# EAGLE board print (EAGLE 6.1)
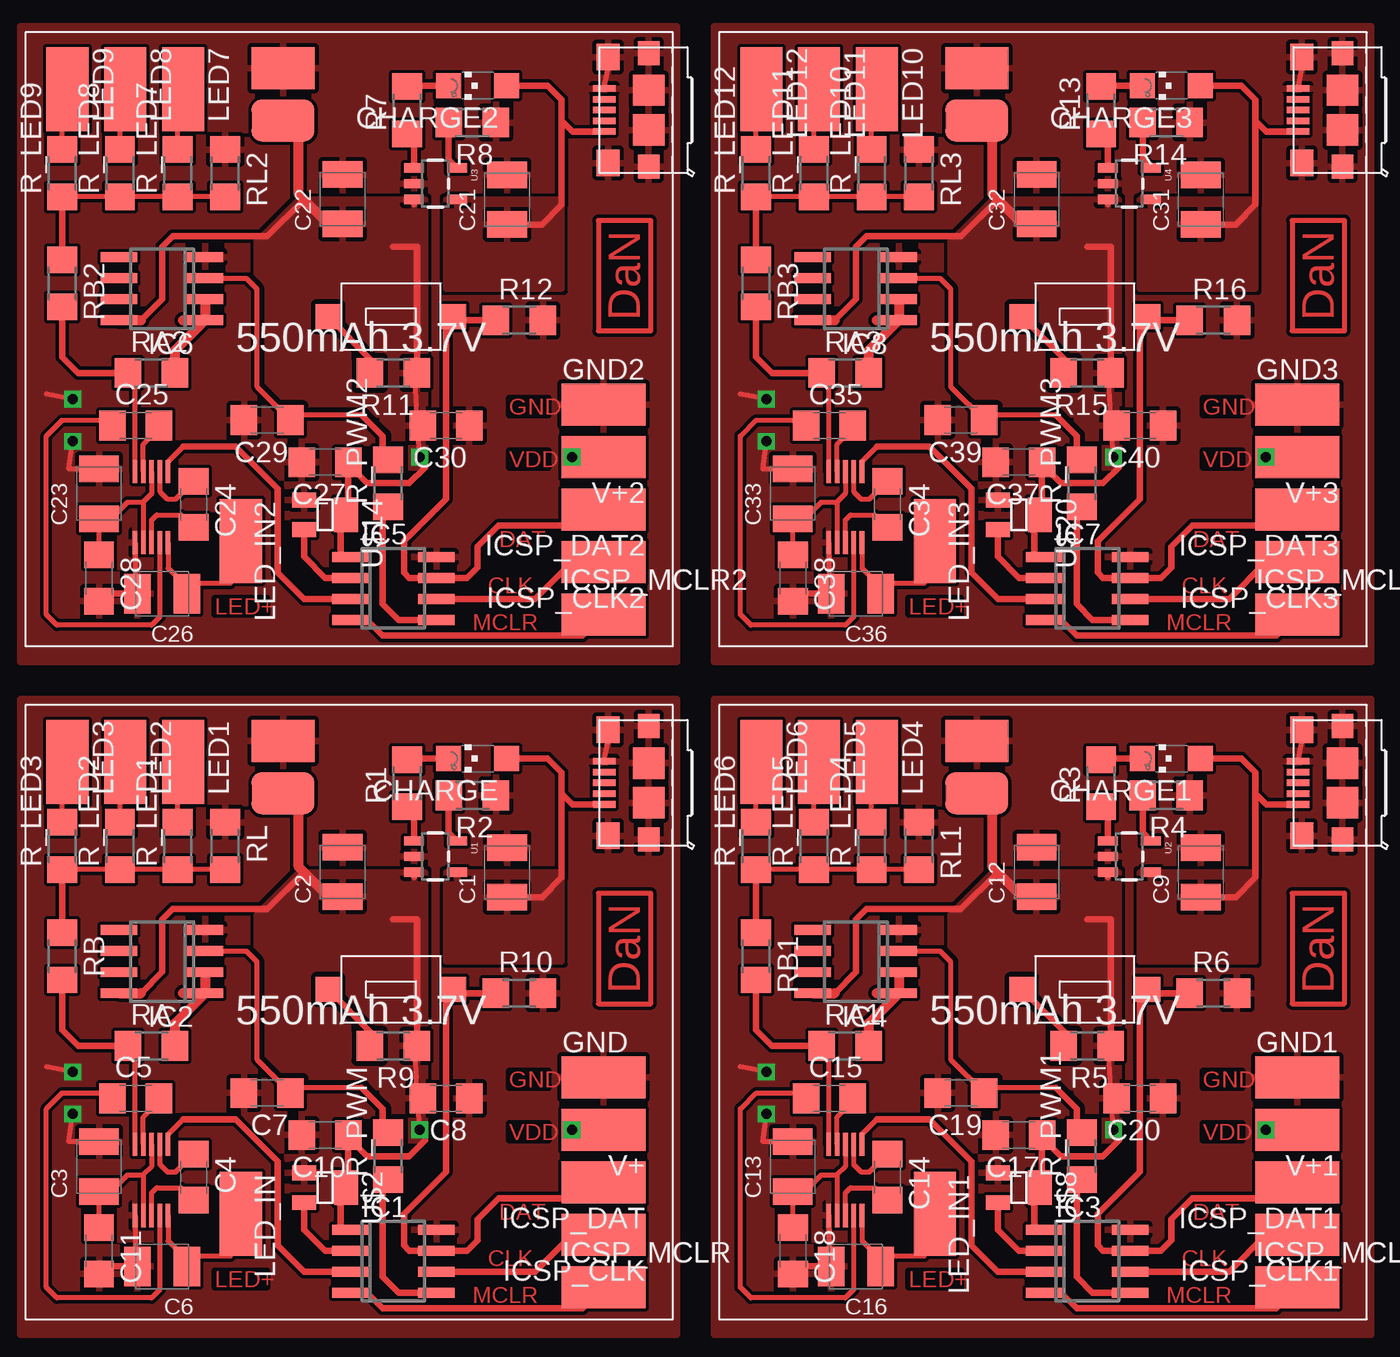
[diagram p0: board, top side]
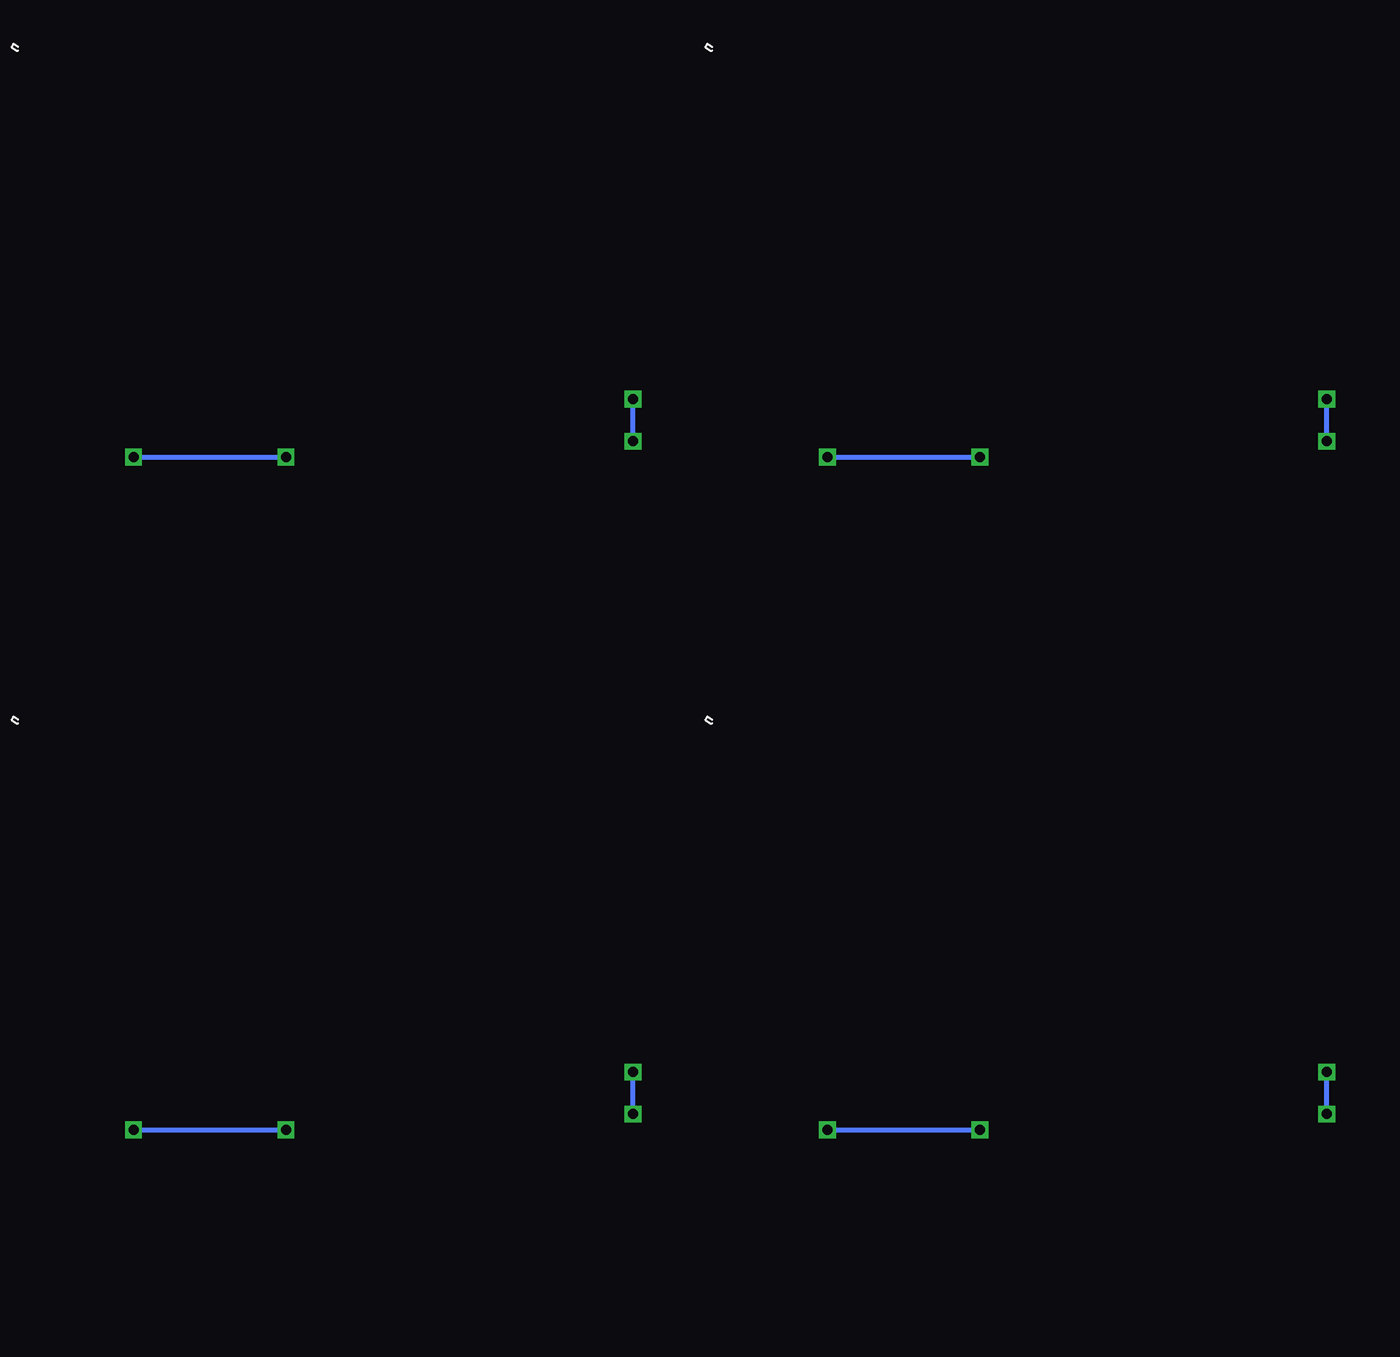
[diagram p1: board, bottom side, seen from below]

No outline drawn. Coordinates in mm, seen from the top.
Copper layers (1*16): Top 0.035mm / dielectric 1.5mm / Bottom 0.035mm
Design rules: minimum track width 10mil, minimum drill 24mil, track to track 8mil, track to pad 8mil, pad to pad 8mil, via to via 8mil, smd to smd 8mil, copper to edge 40mil, drill to drill 8mil, minimum pad ring 10mil, minimum via ring 8mil, stop-mask expansion 4mil, vias tented up to drill 0mil, thermal gap 10mil

## Footprints (pad centres in the part's own frame; a part is rotated, then mirrored left to right if it is on the bottom)
SMC_B = smd 1.6 x 2.4: + -1.5,0; - 1.5,0
C1206 = smd 1.6 x 1.8: 1 -1.4,0; 2 1.4,0
CHIPLED_1206 = smd 1.5 x 1.5: A 0,-1.75; C 0,1.75
SMD2,54-5,08 = smd 2.54 x 5.08: 1 0,0
SO-08 = smd 0.6 x 2.2: 1 -1.905,-2.6; 2 -0.635,-2.6; 3 0.635,-2.6; 4 1.905,-2.6; 5 1.905,2.6; 6 0.635,2.6; 7 -0.635,2.6; 8 -1.905,2.6
SO08 = smd 0.6 x 2.2: 1 -1.905,-2.6; 2 -0.635,-2.6; 3 0.635,-2.6; 4 1.905,-2.6; 5 1.905,2.6; 6 0.635,2.6; 7 -0.635,2.6; 8 -1.905,2.6
R1206 = smd 1.6 x 1.803: 1 -1.422,0; 2 1.422,0
SOT23-5 = smd 0.55 x 1.2: 1 -0.95,-1.3; 2 0,-1.3; 3 0.95,-1.3; 4 0.95,1.3; 5 -0.95,1.3
UMAX/USOP_10L = smd 1.4 x 0.28: 1 -2,1; 2 -2,0.5; 3 -2,0; 4 -2,-0.5; 5 -2,-1; 6 2.3,-1; 7 2.3,-0.5; 8 2.3,0; 9 2.3,0.5; 10 2.3,1
SC70-3-W = smd 0.9 x 1.45: 1 -0.9,-1.275; 2 0.9,-1.275 | smd 2.1 x 1.45: 3 0,1.275
BAT520_CONN_SMD = smd 2.54 x 3.81: GND 1.905,0; VCC -1.27,0
MICRO_USB_B = smd 0.4 x 1.35: 1 -1.3,1.865; 2 -0.65,1.865; 3 0,1.865; 4 0.65,1.865; 5 1.3,1.865 | smd 1.6 x 1.4: GND1 -3.2,1.64; GND2 3.2,1.64 | smd 1.45 x 1.3: GND3 -3.425,-0.81; GND4 3.425,-0.81 | smd 1.9 x 1.9: GND5 -1.2,-0.81; GND6 1.2,-0.81
MICROBUTTON_2 = smd 1.5 x 1.5: P$1 3.625,0.095; P$2 -3.975,0.095

## Placement (x,y rotation side)
C1  >4.7u  [SMC_B]  29.73,27.61 90 top
C2  >4.7u  [SMC_B]  19.8,27.63 90 top
C3  2.2u-10u  [SMC_B]  5.08,9.84 90 top
C4  470n  [C1206]  10.79,9.21 270 top
C5  470n  [C1206]  7.3,13.97 0 top
C6  4u7  [SMC_B]  8.89,3.81 180 top
C7  470n  [C1206]  15.24,14.29 180 top
C8  100n  [C1206]  26.04,13.97 180 top
C9  >4.7u  [SMC_B]  71.64,27.61 90 top
C10  100n  [C1206]  18.73,11.75 180 top
C11  100n  [C1206]  5.08,4.76 270 top
C12  >4.7u  [SMC_B]  61.71,27.63 90 top
C13  2.2u-10u  [SMC_B]  46.99,9.84 90 top
C14  470n  [C1206]  52.7,9.21 270 top
C15  470n  [C1206]  49.21,13.97 0 top
C16  4u7  [SMC_B]  50.8,3.81 180 top
C17  100n  [C1206]  60.64,11.75 180 top
C18  100n  [C1206]  46.99,4.76 270 top
C19  470n  [C1206]  57.15,14.29 180 top
C20  100n  [C1206]  67.94,13.97 180 top
C21  >4.7u  [SMC_B]  29.73,68.25 90 top
C22  >4.7u  [SMC_B]  19.8,68.27 90 top
C23  2.2u-10u  [SMC_B]  5.08,50.48 90 top
C24  470n  [C1206]  10.79,49.85 270 top
C25  470n  [C1206]  7.3,54.61 0 top
C26  4u7  [SMC_B]  8.89,44.45 180 top
C27  100n  [C1206]  18.73,52.39 180 top
C28  100n  [C1206]  5.08,45.4 270 top
C29  470n  [C1206]  15.24,54.93 180 top
C30  100n  [C1206]  26.04,54.61 180 top
C31  >4.7u  [SMC_B]  71.64,68.25 90 top
C32  >4.7u  [SMC_B]  61.71,68.27 90 top
C33  2.2u-10u  [SMC_B]  46.99,50.48 90 top
C34  470n  [C1206]  52.7,49.85 270 top
C35  470n  [C1206]  49.21,54.61 0 top
C36  4u7  [SMC_B]  50.8,44.45 180 top
C37  100n  [C1206]  60.64,52.39 180 top
C38  100n  [C1206]  46.99,45.4 270 top
C39  470n  [C1206]  57.15,54.93 180 top
C40  100n  [C1206]  67.94,54.61 180 top
CHARGE  [CHIPLED_1206]  27.95,34.49 90 top
CHARGE1  [CHIPLED_1206]  69.86,34.49 90 top
CHARGE2  [CHIPLED_1206]  27.95,75.13 90 top
CHARGE3  [CHIPLED_1206]  69.86,75.13 90 top
GND  [SMD2,54-5,08]  35.56,15.24 270 top
GND1  [SMD2,54-5,08]  77.47,15.24 270 top
GND2  [SMD2,54-5,08]  35.56,55.88 270 top
GND3  [SMD2,54-5,08]  77.47,55.88 270 top
IC1  PIC12F683SN  [SO-08]  22.86,4.13 270 top
IC2  LM358D  [SO08]  8.89,22.23 90 top
IC3  PIC12F683SN  [SO-08]  64.77,4.13 270 top
IC4  LM358D  [SO08]  50.8,22.23 90 top
IC5  PIC12F683SN  [SO-08]  22.86,44.77 270 top
IC6  LM358D  [SO08]  8.89,62.87 90 top
IC7  PIC12F683SN  [SO-08]  64.77,44.77 270 top
IC8  LM358D  [SO08]  50.8,62.87 90 top
ICSP_CLK  [SMD2,54-5,08]  35.56,5.71 90 top
ICSP_CLK1  [SMD2,54-5,08]  77.47,5.71 90 top
ICSP_CLK2  [SMD2,54-5,08]  35.56,46.35 90 top
ICSP_CLK3  [SMD2,54-5,08]  77.47,46.35 90 top
ICSP_DAT  [SMD2,54-5,08]  35.56,8.89 90 top
ICSP_DAT1  [SMD2,54-5,08]  77.47,8.89 90 top
ICSP_DAT2  [SMD2,54-5,08]  35.56,49.53 90 top
ICSP_DAT3  [SMD2,54-5,08]  77.47,49.53 90 top
ICSP_MCLR  [SMD2,54-5,08]  35.56,2.54 270 top
ICSP_MCLR1  [SMD2,54-5,08]  77.47,2.54 270 top
ICSP_MCLR2  [SMD2,54-5,08]  35.56,43.18 270 top
ICSP_MCLR3  [SMD2,54-5,08]  77.47,43.18 270 top
LED1  [SMD2,54-5,08]  10.16,34.29 180 top
LED2  [SMD2,54-5,08]  6.67,34.29 180 top
LED3  [SMD2,54-5,08]  3.17,34.29 180 top
LED4  [SMD2,54-5,08]  52.07,34.29 180 top
LED5  [SMD2,54-5,08]  48.58,34.29 180 top
LED6  [SMD2,54-5,08]  45.09,34.29 180 top
LED7  [SMD2,54-5,08]  10.16,74.93 180 top
LED8  [SMD2,54-5,08]  6.67,74.93 180 top
LED9  [SMD2,54-5,08]  3.17,74.93 180 top
LED10  [SMD2,54-5,08]  52.07,74.93 180 top
LED11  [SMD2,54-5,08]  48.58,74.93 180 top
LED12  [SMD2,54-5,08]  45.09,74.93 180 top
LED_IN  [SMD2,54-5,08]  13.65,6.99 180 top
LED_IN1  [SMD2,54-5,08]  55.56,6.99 180 top
LED_IN2  [SMD2,54-5,08]  13.65,47.62 180 top
LED_IN3  [SMD2,54-5,08]  55.56,47.62 180 top
R1  330  [R1206]  23.7,33.01 90 top
R2  >3k8  [R1206]  27.63,32.27 180 top
R3  330  [R1206]  65.61,33.01 90 top
R4  >3k8  [R1206]  69.54,32.27 180 top
R5  1K  [R1206]  64.77,17.14 180 top
R6  10K  [R1206]  72.39,20.32 0 top
R7  330  [R1206]  23.7,73.65 90 top
R8  >3k8  [R1206]  27.63,72.91 180 top
R9  1K  [R1206]  22.86,17.14 180 top
R10  10K  [R1206]  30.48,20.32 0 top
R11  1K  [R1206]  22.86,57.78 180 top
R12  10K  [R1206]  30.48,60.96 0 top
R13  330  [R1206]  65.61,73.65 90 top
R14  >3k8  [R1206]  69.54,72.91 180 top
R15  1K  [R1206]  64.77,57.78 180 top
R16  10K  [R1206]  72.39,60.96 0 top
R_LED1  [R1206]  9.84,29.21 90 top
R_LED2  [R1206]  6.35,29.21 90 top
R_LED3  [R1206]  2.86,29.21 90 top
R_LED4  [R1206]  51.75,29.21 90 top
R_LED5  [R1206]  48.26,29.21 90 top
R_LED6  [R1206]  44.77,29.21 90 top
R_LED7  [R1206]  9.84,69.85 90 top
R_LED8  [R1206]  6.35,69.85 90 top
R_LED9  [R1206]  2.86,69.85 90 top
R_LED10  [R1206]  51.75,69.85 90 top
R_LED11  [R1206]  48.26,69.85 90 top
R_LED12  [R1206]  44.77,69.85 90 top
R_PWM  [R1206]  22.54,10.48 90 top
R_PWM1  [R1206]  64.45,10.48 90 top
R_PWM2  [R1206]  22.54,51.12 90 top
R_PWM3  [R1206]  64.45,51.12 90 top
RA  [R1206]  8.26,17.14 0 top
RA1  [R1206]  50.16,17.14 0 top
RA2  [R1206]  8.26,57.78 0 top
RA3  [R1206]  50.16,57.78 0 top
RB  [R1206]  2.86,22.54 270 top
RB1  [R1206]  44.77,22.54 270 top
RB2  [R1206]  2.86,63.18 270 top
RB3  [R1206]  44.77,63.18 270 top
RL  [R1206]  12.7,29.21 270 top
RL1  [R1206]  54.61,29.21 270 top
RL2  [R1206]  12.7,69.85 270 top
RL3  [R1206]  54.61,69.85 270 top
U1  MCP73832  [SOT23-5]  25.4,28.57 270 top
U2  MCP73832  [SOT23-5]  67.31,28.57 270 top
U3  MCP73832  [SOT23-5]  25.4,69.22 270 top
U4  MCP73832  [SOT23-5]  67.31,69.22 270 top
U$1  MAX1910/12  [UMAX/USOP_10L]  8.26,8.89 90 top
U$2  MAX6375  [SC70-3-W]  18.73,8.57 270 top
U$3  BAT520_CONNECTION  [BAT520_CONN_SMD]  16.19,33.66 90 top
U$4  BAT_DS0201_PACKAGE  [BAT_DS0201]  19.68,19.68 0 top
U$5  MICRO_USB_B  [MICRO_USB_B]  37.47,33.02 90 top
U$6  MICROBUTTONE-MERCHAN  [MICROBUTTON_2]  22.54,20.64 180 top
U$7  MAX1910/12  [UMAX/USOP_10L]  50.16,8.89 90 top
U$8  MAX6375  [SC70-3-W]  60.64,8.57 270 top
U$9  BAT520_CONNECTION  [BAT520_CONN_SMD]  58.1,33.66 90 top
U$10  BAT_DS0201_PACKAGE  [BAT_DS0201]  61.59,19.68 0 top
U$11  MICRO_USB_B  [MICRO_USB_B]  79.38,33.02 90 top
U$12  MICROBUTTONE-MERCHAN  [MICROBUTTON_2]  64.45,20.64 180 top
U$13  MAX1910/12  [UMAX/USOP_10L]  8.26,49.53 90 top
U$14  MAX6375  [SC70-3-W]  18.73,49.21 270 top
U$15  BAT520_CONNECTION  [BAT520_CONN_SMD]  16.19,74.3 90 top
U$16  BAT_DS0201_PACKAGE  [BAT_DS0201]  19.68,60.33 0 top
U$17  MICRO_USB_B  [MICRO_USB_B]  37.47,73.66 90 top
U$18  MICROBUTTONE-MERCHAN  [MICROBUTTON_2]  22.54,61.28 180 top
U$19  MAX1910/12  [UMAX/USOP_10L]  50.16,49.53 90 top
U$20  MAX6375  [SC70-3-W]  60.64,49.21 270 top
U$21  BAT520_CONNECTION  [BAT520_CONN_SMD]  58.1,74.3 90 top
U$22  BAT_DS0201_PACKAGE  [BAT_DS0201]  61.59,60.33 0 top
U$23  MICRO_USB_B  [MICRO_USB_B]  79.38,73.66 90 top
U$24  MICROBUTTONE-MERCHAN  [MICROBUTTON_2]  64.45,61.28 180 top
V+  [SMD2,54-5,08]  35.56,12.06 90 top
V+1  [SMD2,54-5,08]  77.47,12.06 90 top
V+2  [SMD2,54-5,08]  35.56,52.7 90 top
V+3  [SMD2,54-5,08]  77.47,52.7 90 top

## Library data of the parts
C1-C40 R1-R16 R_LED1-R_LED12 R_PWM R_PWM1-R_PWM3 RA RA1-RA3 RB RB1-RB3 RL RL1-RL3 = rcl
CHARGE CHARGE1-CHARGE3 = led
GND GND1-GND3 ICSP_CLK ICSP_CLK1-ICSP_CLK3 ICSP_DAT ICSP_DAT1-ICSP_DAT3 ICSP_MCLR ICSP_MCLR1-ICSP_MCLR3 LED1-LED12 LED_IN LED_IN1-LED_IN3 V+ V+1-V+3 = wirepad
IC1 IC3 IC5 IC7 = microchip; MF: MICROCHIP; MPN: PIC12F683-I/SN; OC_FARNELL: 9759042; OC_NEWARK: 61K3434
IC2 IC4 IC6 IC8 = linear
U1-U4 U$1-U$24 = dan

## Nets
+5V: C1.+ CHARGE.A U1.4 U$5.1
+5V1: C9.+ CHARGE1.A U2.4 U$11.1
+5V2: C21.+ CHARGE2.A U3.4 U$17.1
+5V3: C31.+ CHARGE3.A U4.4 U$23.1
/OUT: IC1.2 U$2.2
/OUT1: IC3.2 U$8.2
/OUT2: IC5.2 U$14.2
/OUT3: IC7.2 U$20.2
/SHDN: IC1.3 U$1.6
/SHDN1: IC3.3 U$7.6
/SHDN2: IC5.3 U$13.6
/SHDN3: IC7.3 U$19.6
GND: C1.- C2.- C3.- C6.- C7.2 C8.1 C10.2 C11.2 GND.1 IC1.8 IC2.4 R2.1 R10.2 RL.1 U1.2 U$1.1 U$2.1 U$3.GND U$5.5 U$5.GND1 U$5.GND2 U$5.GND3 U$5.GND4 U$5.GND5 U$5.GND6
GND1: C9.- C12.- C13.- C16.- C17.2 C18.2 C19.2 C20.1 GND1.1 IC3.8 IC4.4 R4.1 R6.2 RL1.1 U2.2 U$7.1 U$8.1 U$9.GND U$11.5 U$11.GND1 U$11.GND2 U$11.GND3 U$11.GND4 U$11.GND5 U$11.GND6
GND2: C21.- C22.- C23.- C26.- C27.2 C28.2 C29.2 C30.1 GND2.1 IC5.8 IC6.4 R8.1 R12.2 RL2.1 U3.2 U$13.1 U$14.1 U$15.GND U$17.5 U$17.GND1 U$17.GND2 U$17.GND3 U$17.GND4 U$17.GND5 U$17.GND6
GND3: C31.- C32.- C33.- C36.- C37.2 C38.2 C39.2 C40.1 GND3.1 IC7.8 IC8.4 R14.1 R16.2 RL3.1 U4.2 U$19.1 U$20.1 U$21.GND U$23.5 U$23.GND1 U$23.GND2 U$23.GND3 U$23.GND4 U$23.GND5 U$23.GND6
LED_DAC: IC2.1 IC2.2 RA.2
LED_DAC1: IC4.1 IC4.2 RA1.2
LED_DAC2: IC6.1 IC6.2 RA2.2
LED_DAC3: IC8.1 IC8.2 RA3.2
N$1: R_LED1.1 R_LED2.1 R_LED3.1 RB.1 RL.2
N$2: C7.1 IC2.3 R_PWM.2
N$3: R2.2 U1.5
N$4: R1.1 U1.1
N$5: C4.2 U$1.3
N$6: C4.1 U$1.7
N$7: C5.2 U$1.9
N$8: C5.1 U$1.4
N$10: LED3.1 R_LED3.2
N$11: LED2.1 R_LED2.2
N$12: RA.1 RB.2 U$1.10
N$13: LED1.1 R_LED1.2
N$14: C6.+ LED_IN.1 U$1.5
N$15: CHARGE.C R1.2
N$16: R9.2 U$6.P$1
N$17: R4.2 U2.5
N$18: C14.2 U$7.3
N$19: C14.1 U$7.7
N$20: C15.2 U$7.9
N$21: C15.1 U$7.4
N$22: RA1.1 RB1.2 U$7.10
N$23: C16.+ LED_IN1.1 U$7.5
N$25: R_LED4.1 R_LED5.1 R_LED6.1 RB1.1 RL1.2
N$26: LED6.1 R_LED6.2
N$27: LED5.1 R_LED5.2
N$28: LED4.1 R_LED4.2
N$29: CHARGE1.C R3.2
N$30: R3.1 U2.1
N$31: C19.1 IC4.3 R_PWM1.2
N$32: R5.2 U$12.P$1
N$33: R8.2 U3.5
N$34: C24.2 U$13.3
N$35: C24.1 U$13.7
N$36: C25.2 U$13.9
N$37: C25.1 U$13.4
N$38: RA2.1 RB2.2 U$13.10
N$39: C26.+ LED_IN2.1 U$13.5
N$41: R_LED7.1 R_LED8.1 R_LED9.1 RB2.1 RL2.2
N$42: LED9.1 R_LED9.2
N$43: LED8.1 R_LED8.2
N$44: LED7.1 R_LED7.2
N$45: CHARGE2.C R7.2
N$46: R7.1 U3.1
N$47: C29.1 IC6.3 R_PWM2.2
N$48: R11.2 U$18.P$1
N$49: R14.2 U4.5
N$50: C34.2 U$19.3
N$51: C34.1 U$19.7
N$52: C35.2 U$19.9
N$53: C35.1 U$19.4
N$54: RA3.1 RB3.2 U$19.10
N$55: C36.+ LED_IN3.1 U$19.5
N$57: R_LED10.1 R_LED11.1 R_LED12.1 RB3.1 RL3.2
N$58: LED12.1 R_LED12.2
N$59: LED11.1 R_LED11.2
N$60: LED10.1 R_LED10.2
N$61: CHARGE3.C R13.2
N$62: R13.1 U4.1
N$63: C39.1 IC8.3 R_PWM3.2
N$64: R15.2 U$24.P$1
PIC_MCLR: IC1.4 ICSP_MCLR.1
PIC_MCLR1: IC3.4 ICSP_MCLR1.1
PIC_MCLR2: IC5.4 ICSP_MCLR2.1
PIC_MCLR3: IC7.4 ICSP_MCLR3.1
PIC_PGC: IC1.6 ICSP_CLK.1
PIC_PGC1: IC3.6 ICSP_CLK1.1
PIC_PGC2: IC5.6 ICSP_CLK2.1
PIC_PGC3: IC7.6 ICSP_CLK3.1
PIC_PGD: IC1.7 ICSP_DAT.1 R10.1 U$6.P$2
PIC_PGD1: IC3.7 ICSP_DAT1.1 R6.1 U$12.P$2
PIC_PGD2: IC5.7 ICSP_DAT2.1 R12.1 U$18.P$2
PIC_PGD3: IC7.7 ICSP_DAT3.1 R16.1 U$24.P$2
PIC_PWM: IC1.5 R_PWM.1
PIC_PWM1: IC3.5 R_PWM1.1
PIC_PWM2: IC5.5 R_PWM2.1
PIC_PWM3: IC7.5 R_PWM3.1
SWITCH: C3.+ C11.1 U$1.2 U$1.8
SWITCH1: C13.+ C18.1 U$7.2 U$7.8
SWITCH2: C23.+ C28.1 U$13.2 U$13.8
SWITCH3: C33.+ C38.1 U$19.2 U$19.8
V+: C2.+ C8.2 C10.1 IC1.1 IC2.8 R9.1 U1.3 U$2.3 U$3.VCC V+.1
V+1: C12.+ C17.1 C20.2 IC3.1 IC4.8 R5.1 U2.3 U$8.3 U$9.VCC V+1.1
V+2: C22.+ C27.1 C30.2 IC5.1 IC6.8 R11.1 U3.3 U$14.3 U$15.VCC V+2.1
V+3: C32.+ C37.1 C40.2 IC7.1 IC8.8 R15.1 U4.3 U$20.3 U$21.VCC V+3.1

## Tracks (layer width: path | path; a pad name or v marks a point on that pad's centre or on a via)
+5V
  Top 0.406: CHARGE.A 32.18,34.49 33.02,33.66 33.02,32.38 | 33.02,32.38 33.02,27.3 31.83,26.11 C1.+ | U$5.1 33.69,31.72 33.02,32.38
  pour Top (isolate 0.305): 26.04,27.62 26.04,22.23 33.02,22.23 33.02,27.62
+5V1
  Top 0.406: CHARGE1.A 74.09,34.49 74.93,33.66 74.93,32.38 | 74.93,32.38 74.93,27.3 73.74,26.11 C9.+ | U$11.1 75.59,31.72 74.93,32.38
  pour Top (isolate 0.305): 67.94,27.62 67.94,22.23 74.93,22.23 74.93,27.62
+5V2
  Top 0.406: CHARGE2.A 32.18,75.13 33.02,74.3 33.02,73.03 | 33.02,73.03 33.02,67.94 31.83,66.75 C21.+ | U$17.1 33.69,72.36 33.02,73.03
  pour Top (isolate 0.305): 26.04,68.26 26.04,62.87 33.02,62.87 33.02,68.26
+5V3
  Top 0.406: CHARGE3.A 74.09,75.13 74.93,74.3 74.93,73.03 | 74.93,73.03 74.93,67.94 73.74,66.75 C31.+ | U$23.1 75.59,72.36 74.93,73.03
  pour Top (isolate 0.305): 67.94,68.26 67.94,62.87 74.93,62.87 74.93,68.26
/OUT
  Top 0.406: U$2.2 17.46,6.04 18.73,4.76 IC1.2
/OUT1
  Top 0.406: U$8.2 59.37,6.04 60.64,4.76 IC3.2
/OUT2
  Top 0.406: U$14.2 17.46,46.68 18.73,45.4 IC5.2
/OUT3
  Top 0.406: U$20.2 59.37,46.68 60.64,45.4 IC7.2
/SHDN
  Top 0.305: U$1.6 9.26,11.79 10.16,12.7
  Top 0.406: IC1.3 17.46,3.49 15.88,5.08 15.88,10.16 13.34,12.7 10.16,12.7
/SHDN1
  Top 0.305: U$7.6 51.16,11.79 52.07,12.7
  Top 0.406: IC3.3 59.37,3.49 57.78,5.08 57.78,10.16 55.24,12.7 52.07,12.7
/SHDN2
  Top 0.305: U$13.6 9.26,52.44 10.16,53.34
  Top 0.406: IC5.3 17.46,44.13 15.88,45.72 15.88,50.8 13.34,53.34 10.16,53.34
/SHDN3
  Top 0.305: U$19.6 51.16,52.44 52.07,53.34
  Top 0.406: IC7.3 59.37,44.13 57.78,45.72 57.78,50.8 55.24,53.34 52.07,53.34
GND  (via drill 0.6)
  Top 0.305: U$5.5 35.92,35.99 U$5.GND2 | C3.- 3.26,11.34 v3.49,13.02 | v3.49,15.56 1.91,15.88 | U$1.1 7.25,3.94 C6.-
  Top 0.406: C11.2 5.53,3.81 C6.- 7.62,3.81
  Bottom 0.305: v3.49,13.02 v3.49,15.56
  pour Top (rank 6): 40.01,-0.32 0.32,-0.32 0.32,38.1 40.01,38.1
GND1  (via drill 0.6)
  Top 0.305: U$11.5 77.83,35.99 U$11.GND2 | C13.- 45.17,11.34 v45.4,13.02 | v45.4,15.56 43.81,15.88 | U$7.1 49.16,3.94 C16.-
  Top 0.406: C18.2 47.44,3.81 C16.- 49.53,3.81
  Bottom 0.305: v45.4,13.02 v45.4,15.56
  pour Top (rank 6): 81.92,-0.32 42.23,-0.32 42.23,38.1 81.92,38.1
GND2  (via drill 0.6)
  Top 0.305: U$17.5 35.92,76.64 U$17.GND2 | C23.- 3.26,51.98 v3.49,53.66 | v3.49,56.2 1.91,56.52 | U$13.1 7.25,44.59 C26.-
  Top 0.406: C28.2 5.53,44.45 C26.- 7.62,44.45
  Bottom 0.305: v3.49,53.66 v3.49,56.2
  pour Top (rank 6): 40.01,40.32 0.32,40.32 0.32,78.74 40.01,78.74
GND3  (via drill 0.6)
  Top 0.305: U$23.5 77.83,76.64 U$23.GND2 | C33.- 45.17,51.98 v45.4,53.66 | v45.4,56.2 43.81,56.52 | U$19.1 49.16,44.59 C36.-
  Top 0.406: C38.2 47.44,44.45 C36.- 49.53,44.45
  Bottom 0.305: v45.4,53.66 v45.4,56.2
  pour Top (rank 6): 81.92,40.32 42.23,40.32 42.23,78.74 81.92,78.74
LED_DAC
  Top 0.61: IC2.2 IC2.1 | 10.16,20.32 IC2.1 | 10.79,20.32 IC2.1 | RA.2 9.68,18.51 IC2.1
LED_DAC1
  Top 0.61: IC4.2 IC4.1 | 52.07,20.32 IC4.1 | 52.7,20.32 IC4.1 | RA1.2 51.59,18.51 IC4.1
LED_DAC2
  Top 0.61: IC6.2 IC6.1 | 10.16,60.96 IC6.1 | 10.79,60.96 IC6.1 | RA2.2 9.68,59.15 IC6.1
LED_DAC3
  Top 0.61: IC8.2 IC8.1 | 52.07,60.96 IC8.1 | 52.7,60.96 IC8.1 | RA3.2 51.59,59.15 IC8.1
N$1
  Top 0.305: 3.17,27.3 R_LED3.1 R_LED2.1 R_LED1.1 RL.2
  Top 0.406: RB.1 R_LED3.1
N$2
  Top 0.305: 20.95,14.61 16.51,14.61 16.51,13.97 16.64,14.1 C7.1 14.61,16.32 14.61,22.23 13.97,22.86 IC2.3
  Top 0.406: R_PWM.2 22.23,12.22 22.23,13.34 20.95,14.61
N$3
  Top 0.406: U1.5 26.21,30.02 R2.2
N$4
  Top 0.406: R1.1 24.1,31.19 U1.1
N$5
  Top 0.305: U$1.3 8.26,8.26 8.57,8.57 10.03,8.57 C4.2
N$6
  Top 0.305: U$1.7 8.76,9.98 9.21,9.53 9.71,9.53 C4.1
N$7
  Top 0.305: U$1.9 7.75,12.84 8.89,13.97 C5.2
N$8
  Top 0.305: U$1.4 8.76,2.4 8.26,1.91 2.54,1.91 1.91,2.54 1.91,13.34 2.86,14.29 5.4,14.29 arc-90 5.71,13.97 C5.1
N$9
  Top 0.305: 38.42,19.68 38.42,26.35 35.24,26.35 35.24,19.68 38.42,19.68
N$10
  Top 0.305: R_LED3.2 2.86,33.97 LED3.1
N$11
  Top 0.305: R_LED2.2 6.35,33.97 LED2.1
N$12
  Top 0.305: U$1.10 7.25,17.14 RA.1
  Top 0.406: 6.99,17.14 RA.1 3.81,17.14 2.86,18.1 RB.2 2.86,21.27
N$13
  Top 0.305: R_LED1.2 9.84,33.97 LED1.1
N$14
  Top 0.254: LED_IN.1 13.97,6.99
  Top 0.305: U$1.5 9.26,5.35 10.16,4.45 10.16,3.81 C6.+ | 11.03,4.45 13.02,4.45 13.02,6.03 13.97,6.99
  Top 0.406: C6.+ 11.03,4.45
N$15
  Top 0.406: R1.2 23.76,34.49 CHARGE.C
N$16
  Top 0.305: R9.2 21.59,17.14
  Top 0.406: U$6.P$1 21.59,17.87 21.59,17.14
N$17
  Top 0.406: U2.5 68.12,30.02 R4.2
N$18
  Top 0.305: U$7.3 50.16,8.26 50.48,8.57 51.94,8.57 C14.2
N$19
  Top 0.305: U$7.7 50.66,9.98 51.12,9.53 51.62,9.53 C14.1
N$20
  Top 0.305: U$7.9 49.66,12.84 50.8,13.97 C15.2
N$21
  Top 0.305: U$7.4 50.66,2.4 50.16,1.91 44.45,1.91 43.81,2.54 43.81,13.34 44.77,14.29 47.31,14.29 arc-90 47.62,13.97 C15.1
N$22
  Top 0.305: U$7.10 49.16,17.14 RA1.1
  Top 0.406: 48.9,17.14 RA1.1 45.72,17.14 44.77,18.1 RB1.2 44.77,21.27
N$23
  Top 0.254: LED_IN1.1 55.88,6.99
  Top 0.305: U$7.5 51.16,5.35 52.07,4.45 52.07,3.81 C16.+ | 52.94,4.45 54.93,4.45 54.93,6.03 55.88,6.99
  Top 0.406: C16.+ 52.94,4.45
N$24
  Top 0.305: 80.33,19.68 80.33,26.35 77.15,26.35 77.15,19.68 80.33,19.68
N$25
  Top 0.305: 45.09,27.3 R_LED6.1 R_LED5.1 R_LED4.1 RL1.2
  Top 0.406: RB1.1 R_LED6.1
N$26
  Top 0.305: R_LED6.2 44.77,33.97 LED6.1
N$27
  Top 0.305: R_LED5.2 48.26,33.97 LED5.1
N$28
  Top 0.305: R_LED4.2 51.75,33.97 LED4.1
N$29
  Top 0.406: R3.2 65.67,34.49 CHARGE1.C
N$30
  Top 0.406: R3.1 66.01,31.19 U2.1
N$31
  Top 0.305: 62.87,14.61 58.42,14.61 58.42,13.97 58.55,14.1 C19.1 56.52,16.32 56.52,22.23 55.88,22.86 IC4.3
  Top 0.406: R_PWM1.2 64.14,12.22 64.14,13.34 62.87,14.61
N$32
  Top 0.305: R5.2 63.5,17.14
  Top 0.406: U$12.P$1 63.5,17.87 63.5,17.14
N$33
  Top 0.406: U3.5 26.21,70.66 R8.2
N$34
  Top 0.305: U$13.3 8.26,48.9 8.57,49.21 10.03,49.21 C24.2
N$35
  Top 0.305: U$13.7 8.76,50.62 9.21,50.16 9.71,50.16 C24.1
N$36
  Top 0.305: U$13.9 7.75,53.48 8.89,54.61 C25.2
N$37
  Top 0.305: U$13.4 8.76,43.05 8.26,42.55 2.54,42.55 1.91,43.18 1.91,53.98 2.86,54.93 5.4,54.93 arc-90 5.71,54.61 C25.1
N$38
  Top 0.305: U$13.10 7.25,57.78 RA2.1
  Top 0.406: 6.99,57.78 RA2.1 3.81,57.78 2.86,58.74 RB2.2 2.86,61.91
N$39
  Top 0.254: LED_IN2.1 13.97,47.62
  Top 0.305: U$13.5 9.26,45.99 10.16,45.09 10.16,44.45 C26.+ | 11.03,45.09 13.02,45.09 13.02,46.67 13.97,47.62
  Top 0.406: C26.+ 11.03,45.09
N$40
  Top 0.305: 38.42,60.33 38.42,66.99 35.24,66.99 35.24,60.33 38.42,60.33
N$41
  Top 0.305: 3.17,67.94 R_LED9.1 R_LED8.1 R_LED7.1 RL2.2
  Top 0.406: RB2.1 R_LED9.1
N$42
  Top 0.305: R_LED9.2 2.86,74.61 LED9.1
N$43
  Top 0.305: R_LED8.2 6.35,74.61 LED8.1
N$44
  Top 0.305: R_LED7.2 9.84,74.61 LED7.1
N$45
  Top 0.406: R7.2 23.76,75.13 CHARGE2.C
N$46
  Top 0.406: R7.1 24.1,71.83 U3.1
N$47
  Top 0.305: 20.95,55.24 16.51,55.24 16.51,54.61 16.64,54.74 C29.1 14.61,56.96 14.61,62.87 13.97,63.5 IC6.3
  Top 0.406: R_PWM2.2 22.23,52.86 22.23,53.98 20.95,55.24
N$48
  Top 0.305: R11.2 21.59,57.78
  Top 0.406: U$18.P$1 21.59,58.51 21.59,57.78
N$49
  Top 0.406: U4.5 68.12,70.66 R14.2
N$50
  Top 0.305: U$19.3 50.16,48.9 50.48,49.21 51.94,49.21 C34.2
N$51
  Top 0.305: U$19.7 50.66,50.62 51.12,50.16 51.62,50.16 C34.1
N$52
  Top 0.305: U$19.9 49.66,53.48 50.8,54.61 C35.2
N$53
  Top 0.305: U$19.4 50.66,43.05 50.16,42.55 44.45,42.55 43.81,43.18 43.81,53.98 44.77,54.93 47.31,54.93 arc-90 47.62,54.61 C35.1
N$54
  Top 0.305: U$19.10 49.16,57.78 RA3.1
  Top 0.406: 48.9,57.78 RA3.1 45.72,57.78 44.77,58.74 RB3.2 44.77,61.91
N$55
  Top 0.254: LED_IN3.1 55.88,47.62
  Top 0.305: U$19.5 51.16,45.99 52.07,45.09 52.07,44.45 C36.+ | 52.94,45.09 54.93,45.09 54.93,46.67 55.88,47.62
  Top 0.406: C36.+ 52.94,45.09
N$56
  Top 0.305: 80.33,60.33 80.33,66.99 77.15,66.99 77.15,60.33 80.33,60.33
N$57
  Top 0.305: 45.09,67.94 R_LED12.1 R_LED11.1 R_LED10.1 RL3.2
  Top 0.406: RB3.1 R_LED12.1
N$58
  Top 0.305: R_LED12.2 44.77,74.61 LED12.1
N$59
  Top 0.305: R_LED11.2 48.26,74.61 LED11.1
N$60
  Top 0.305: R_LED10.2 51.75,74.61 LED10.1
N$61
  Top 0.406: R13.2 65.67,75.13 CHARGE3.C
N$62
  Top 0.406: R13.1 66.01,71.83 U4.1
N$63
  Top 0.305: 62.87,55.24 58.42,55.24 58.42,54.61 58.55,54.74 C39.1 56.52,56.96 56.52,62.87 55.88,63.5 IC8.3
  Top 0.406: R_PWM3.2 64.14,52.86 64.14,53.98 62.87,55.24
N$64
  Top 0.305: R15.2 63.5,57.78
  Top 0.406: U$24.P$1 63.5,58.51 63.5,57.78
PIC_MCLR
  Top 0.305: 20.32,2.22 IC1.4
  Top 0.406: 20.32,2.22 21.27,2.22 22.23,1.27 34.29,1.27 ICSP_MCLR.1
PIC_MCLR1
  Top 0.305: 62.23,2.22 IC3.4
  Top 0.406: 62.23,2.22 63.18,2.22 64.14,1.27 76.2,1.27 ICSP_MCLR1.1
PIC_MCLR2
  Top 0.305: 20.32,42.86 IC5.4
  Top 0.406: 20.32,42.86 21.27,42.86 22.23,41.91 34.29,41.91 ICSP_MCLR2.1
PIC_MCLR3
  Top 0.305: 62.23,42.86 IC7.4
  Top 0.406: 62.23,42.86 63.18,42.86 64.14,41.91 76.2,41.91 ICSP_MCLR3.1
PIC_PGC
  Top 0.406: IC1.6 31.43,3.49 33.66,5.71 ICSP_CLK.1 37.47,5.08
PIC_PGC1
  Top 0.406: IC3.6 73.34,3.49 75.56,5.71 ICSP_CLK1.1 79.38,5.08
PIC_PGC2
  Top 0.406: IC5.6 31.43,44.13 33.66,46.35 ICSP_CLK2.1 37.47,45.72
PIC_PGC3
  Top 0.406: IC7.6 73.34,44.13 75.56,46.35 ICSP_CLK3.1 79.38,45.72
PIC_PGD
  Top 0.305: 26.67,20.32 R10.1
  Top 0.406: 26.67,20.95 26.67,20.32 26.04,19.68 26.04,9.53 23.5,6.99 23.5,5.08 23.81,4.76 IC1.7 27.3,4.76 27.94,5.4 27.94,6.67 29.21,7.94 34.61,7.94 arc90 ICSP_DAT.1 | U$6.P$2 26.74,20.32 R10.1 29.21,20.32 | ICSP_DAT.1 37.47,8.89 | ICSP_DAT.1 35.88,7.94
PIC_PGD1
  Top 0.305: 68.58,20.32 R6.1
  Top 0.406: 68.58,20.95 68.58,20.32 67.94,19.68 67.94,9.53 65.41,6.99 65.41,5.08 65.72,4.76 IC3.7 69.22,4.76 69.85,5.4 69.85,6.67 71.12,7.94 76.52,7.94 arc90 ICSP_DAT1.1 | U$12.P$2 68.65,20.32 R6.1 71.12,20.32 | ICSP_DAT1.1 79.38,8.89 | ICSP_DAT1.1 77.79,7.94
PIC_PGD2
  Top 0.305: 26.67,60.96 R12.1
  Top 0.406: 26.67,61.59 26.67,60.96 26.04,60.33 26.04,50.16 23.5,47.62 23.5,45.72 23.81,45.4 IC5.7 27.3,45.4 27.94,46.04 27.94,47.31 29.21,48.58 34.61,48.58 arc90 ICSP_DAT2.1 | U$18.P$2 26.74,60.96 R12.1 29.21,60.96 | ICSP_DAT2.1 37.47,49.53 | ICSP_DAT2.1 35.88,48.58
PIC_PGD3
  Top 0.305: 68.58,60.96 R16.1
  Top 0.406: 68.58,61.59 68.58,60.96 67.94,60.33 67.94,50.16 65.41,47.62 65.41,45.72 65.72,45.4 IC7.7 69.22,45.4 69.85,46.04 69.85,47.31 71.12,48.58 76.52,48.58 arc90 ICSP_DAT3.1 | U$24.P$2 68.65,60.96 R16.1 71.12,60.96 | ICSP_DAT3.1 79.38,49.53 | ICSP_DAT3.1 77.79,48.58
PIC_PWM
  Top 0.305: R_PWM.1 22.7,9.06 22.86,8.89
  Top 0.406: 22.86,8.89 22.86,9.53 22.23,8.89 22.23,3.17 23.18,2.22 IC1.5
PIC_PWM1
  Top 0.305: R_PWM1.1 64.61,9.06 64.77,8.89
  Top 0.406: 64.77,8.89 64.77,9.53 64.14,8.89 64.14,3.17 65.09,2.22 IC3.5
PIC_PWM2
  Top 0.305: R_PWM2.1 22.7,49.7 22.86,49.53
  Top 0.406: 22.86,49.53 22.86,50.16 22.23,49.53 22.23,43.81 23.18,42.86 IC5.5
PIC_PWM3
  Top 0.305: R_PWM3.1 64.61,49.7 64.77,49.53
  Top 0.406: 64.77,49.53 64.77,50.16 64.14,49.53 64.14,43.81 65.09,42.86 IC7.5
SWITCH
  Top 0.305: U$1.8 8.26,9.84 7.75,9.34 | 7.75,9.34 U$1.2 | 7.75,9.34 6.8,9.34 5.71,8.26 5.17,8.26 C3.+ C11.1
SWITCH1
  Top 0.305: U$7.8 50.16,9.84 49.66,9.34 | 49.66,9.34 U$7.2 | 49.66,9.34 48.71,9.34 47.62,8.26 47.08,8.26 C13.+ C18.1
SWITCH2
  Top 0.305: U$13.8 8.26,50.48 7.75,49.98 | 7.75,49.98 U$13.2 | 7.75,49.98 6.8,49.98 5.71,48.9 5.17,48.9 C23.+ C28.1
SWITCH3
  Top 0.305: U$19.8 50.16,50.48 49.66,49.98 | 49.66,49.98 U$19.2 | 49.66,49.98 48.71,49.98 47.62,48.9 47.08,48.9 C33.+ C38.1
V+  (via drill 0.6)
  Top 0.305: 24.13,27.3 24.1,27.3 U1.3 | U$3.VCC 16.51,32.38 16.83,32.7 | v24.45,12.06 24.13,17.14 | 20.32,11.43 20.32,11.56 C10.1 | v33.66,12.06 34.92,12.7 V+.1
  Top 0.406: 7.62,20.32 8.89,21.59 8.89,24.77 9.53,25.4 15.24,25.4 17.46,27.62 | C10.1 20.13,8.44 20.32,8.26 | 20.01,8.26 20.32,8.26 | 20.32,8.26 U$2.3 20.01,8.26 | 19.62,7.56 20.32,8.26 | 24.77,11.43 23.81,10.48 21.27,10.48 20.32,11.43 | 24.77,17.14 R9.1 24.28,24.77 22.86,24.77 | IC1.1 19.68,6.03 19.68,8.26 20.01,8.26
  Top 0.61: C2.+ 18.95,26.13 17.46,27.62 17.14,27.94 17.14,32.38 16.83,32.7 16.51,33.02 | IC2.8 7.62,20.32
  Top 0.813: 19.05,26.04 19.68,26.04
  Bottom 0.305: v33.66,12.06 v24.45,12.06
  pour Top (isolate 0.305): 24.77,27.62 24.77,11.43 22.23,11.43 22.23,14.61 14.61,15.24 14.61,25.08 17.14,27.62
V+1  (via drill 0.6)
  Top 0.305: 66.04,27.3 66.01,27.3 U2.3 | U$9.VCC 58.42,32.38 58.74,32.7 | v66.36,12.06 66.04,17.14 | 62.23,11.43 62.23,11.56 C17.1 | v75.56,12.06 76.83,12.7 V+1.1
  Top 0.406: 49.53,20.32 50.8,21.59 50.8,24.77 51.44,25.4 57.15,25.4 59.37,27.62 | C17.1 62.04,8.44 62.23,8.26 | 61.92,8.26 62.23,8.26 | 62.23,8.26 U$8.3 61.92,8.26 | 61.53,7.56 62.23,8.26 | 66.67,11.43 65.72,10.48 63.18,10.48 62.23,11.43 | 66.67,17.14 R5.1 66.19,24.77 64.77,24.77 | IC3.1 61.59,6.03 61.59,8.26 61.92,8.26
  Top 0.61: C12.+ 60.86,26.13 59.37,27.62 59.05,27.94 59.05,32.38 58.74,32.7 58.42,33.02 | IC4.8 49.53,20.32
  Top 0.813: 60.96,26.04 61.59,26.04
  Bottom 0.305: v75.56,12.06 v66.36,12.06
  pour Top (isolate 0.305): 66.67,27.62 66.67,11.43 64.14,11.43 64.14,14.61 56.52,15.24 56.52,25.08 59.05,27.62
V+2  (via drill 0.6)
  Top 0.305: 24.13,67.94 24.1,67.94 U3.3 | U$15.VCC 16.51,73.03 16.83,73.34 | v24.45,52.7 24.13,57.78 | 20.32,52.07 20.32,52.2 C27.1 | v33.66,52.7 34.92,53.34 V+2.1
  Top 0.406: 7.62,60.96 8.89,62.23 8.89,65.41 9.53,66.04 15.24,66.04 17.46,68.26 | C27.1 20.13,49.08 20.32,48.9 | 20.01,48.9 20.32,48.9 | 20.32,48.9 U$14.3 20.01,48.9 | 19.62,48.2 20.32,48.9 | 24.77,52.07 23.81,51.12 21.27,51.12 20.32,52.07 | 24.77,57.78 R11.1 24.28,65.41 22.86,65.41 | IC5.1 19.68,46.67 19.68,48.9 20.01,48.9
  Top 0.61: C22.+ 18.95,66.77 17.46,68.26 17.14,68.58 17.14,73.03 16.83,73.34 16.51,73.66 | IC6.8 7.62,60.96
  Top 0.813: 19.05,66.67 19.68,66.67
  Bottom 0.305: v33.66,52.7 v24.45,52.7
  pour Top (isolate 0.305): 24.77,68.26 24.77,52.07 22.23,52.07 22.23,55.24 14.61,55.88 14.61,65.72 17.14,68.26
V+3  (via drill 0.6)
  Top 0.305: 66.04,67.94 66.01,67.94 U4.3 | U$21.VCC 58.42,73.03 58.74,73.34 | v66.36,52.7 66.04,57.78 | 62.23,52.07 62.23,52.2 C37.1 | v75.56,52.7 76.83,53.34 V+3.1
  Top 0.406: 49.53,60.96 50.8,62.23 50.8,65.41 51.44,66.04 57.15,66.04 59.37,68.26 | C37.1 62.04,49.08 62.23,48.9 | 61.92,48.9 62.23,48.9 | 62.23,48.9 U$20.3 61.92,48.9 | 61.53,48.2 62.23,48.9 | 66.67,52.07 65.72,51.12 63.18,51.12 62.23,52.07 | 66.67,57.78 R15.1 66.19,65.41 64.77,65.41 | IC7.1 61.59,46.67 61.59,48.9 61.92,48.9
  Top 0.61: C32.+ 60.86,66.77 59.37,68.26 59.05,68.58 59.05,73.03 58.74,73.34 58.42,73.66 | IC8.8 49.53,60.96
  Top 0.813: 60.96,66.67 61.59,66.67
  Bottom 0.305: v75.56,52.7 v66.36,52.7
  pour Top (isolate 0.305): 66.67,68.26 66.67,52.07 64.14,52.07 64.14,55.24 56.52,55.88 56.52,65.72 59.05,68.26

## Text on the board
Top: DaN | DaN | GND | GND | VDD | VDD | DAT | DAT | CLK | CLK | LED+ | LED+ | MCLR | MCLR | DaN | DaN | GND | GND | VDD | VDD | DAT | DAT | CLK | CLK | LED+ | LED+ | MCLR | MCLR